# Altium PCB Smart_Podium.PcbDoc (part 3 of 3)
Units mm, origin at the board's own origin, x right, y up, seen from the top; angles counter-clockwise.
Board outline 100 x 100 mm, 4 copper layers (Top Layer, Inner Layer 1 (GND), Inner Layer 2 (GND), Bottom Layer), stack 1.57 mm thick; 107 components, 94 nets, 341 pads, 455 vias.
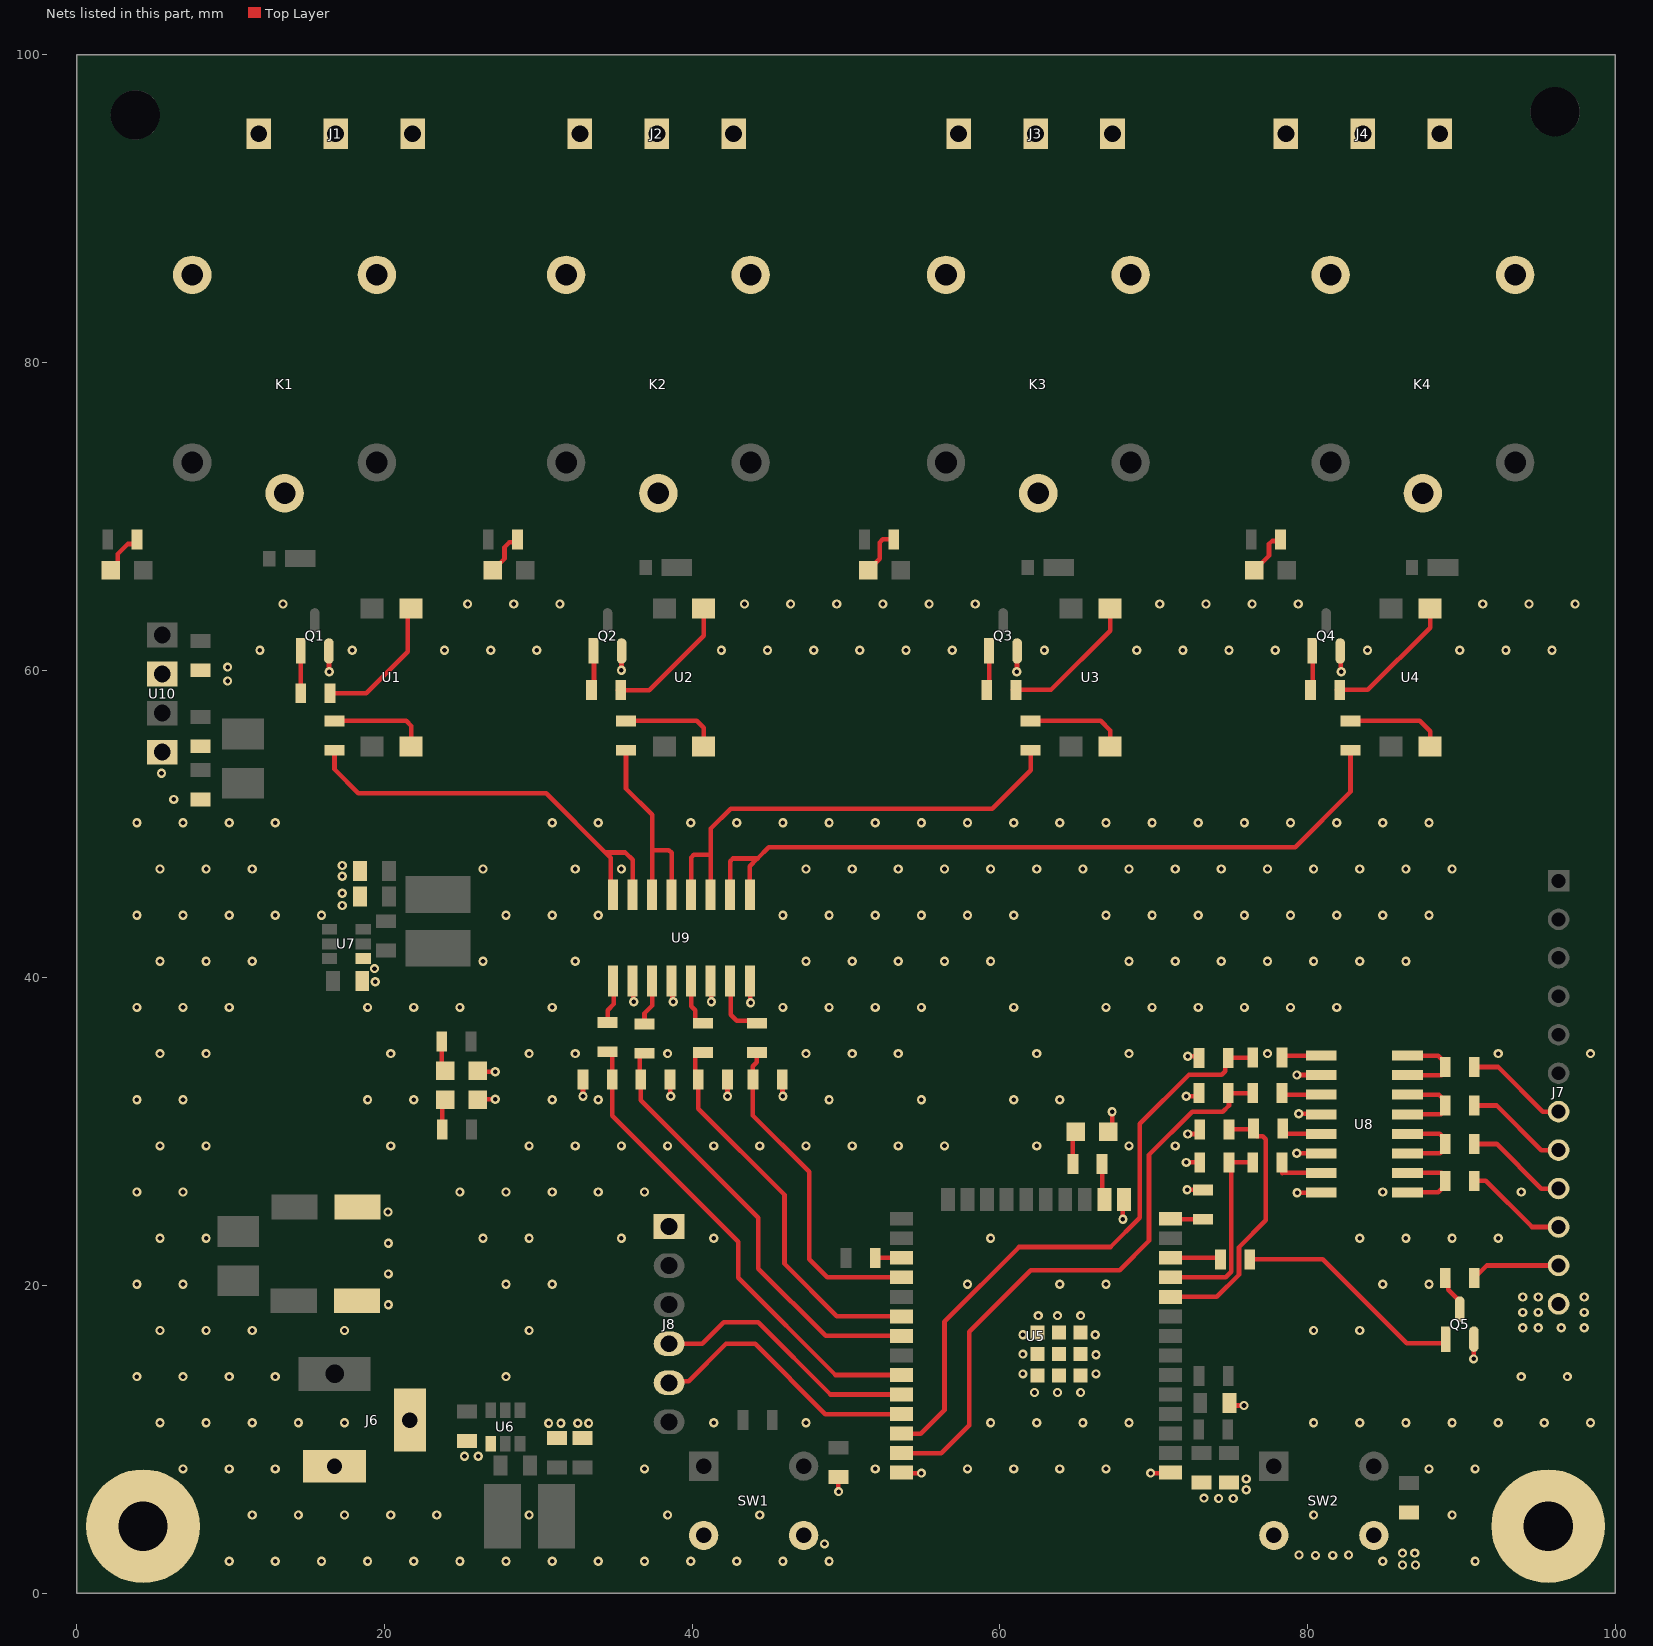
[diagram p4: the nets of this part, all layers, seen from the top]

## Via types
v1: diameter 0.6, hole 0.3, Top Layer to Bottom Layer, tented both sides, 455 vias

## Nets (pads, with @x,y where several pads share a name; then routed paths per layer and width w, separated by ;. In a path a pad name is that pad's centre, name@x,y a point inside that pad or via, vN(x,y) a via of type N, cw(c..) or ccw(c..) an arc to the next point about the centre after c; other vN are vias at no path point) (continued)
GND: C1.1 C2.1 C3.2 C4.1 C5.2 C6.2 C7.1 C8.1 C9.1 C12.1 C13.1 C14.1 C15.1 C16.1 C17.1 D5.1 D6.1 D11.1 J6.2 J6.3 J7.12 J8.1 MH1.1 MH2.1 Q5.2 R12.2 R30.2 R31.2 R32.2 R33.2 R34.2 R35.2 R36.2 R37.2 SW1.3 SW1.4 SW2.3 SW2.4 U5.1 U5.15 U5.38 U5.39_1 U5.39_2 U5.39_3 U5.39_4 U5.39_5 U5.39_6 U5.39_7 U5.39_8 U5.39_9 U6.4 U7.4 U8.10 U8.12 U8.14 U8.16 U9.10 U9.12 U9.14 U9.16 U10.1 | length 31.8
  Top Layer w0.3: D6.1@26.05,32.075 26.075,32.1 v1(27.2,32.1) ; D5.1@26.05,33.95 26.1,33.9 v1(27.2,33.9) ; v1(32.9,32.3) R34.2@32.9,33.4 ; U9.10@36.125,39.8 36.163,39.762 36.163,38.487 v1(36.2,38.45) ; R35.2@38.55,33.4 38.575,33.375 38.575,32.325 v1(38.6,32.3) ; U9.12@38.665,39.8 38.72,39.745 38.72,38.505 v1(38.775,38.45) ; U9.14@41.205,39.8 41.227,39.777 41.227,38.472 v1(41.25,38.45) ; v1(42.3,32.3) R36.2@42.3,33.4 ; U9.16@43.745,39.8 43.772,39.772 43.772,38.403 v1(43.8,38.375) ; R37.2@45.85,33.4 45.875,33.375 45.875,32.325 v1(45.9,32.3) ; C7.1@49.5,7.55 49.5,6.618 v1(49.518,6.6) ; U5.38@53.6,7.83 53.63,7.8 v1(54.9,7.8) ; D11.1@67.05,30 67.3,30.25 v1(67.3,31.3) ; v1(68,24.3) 68,25.525 U5.15@68.065,25.59 ; v1(69.8,7.8) 71.07,7.8 U5.1@71.1,7.83 ; v1(72.113,27.999) 72.999,27.999 R33.2@73,28 ; v1(72.113,32.299) 72.75,32.299 72.95,32.499 R31.2@72.95,32.5 ; v1(72.175,26.225) 72.187,26.213 73.187,26.213 R12.2@73.2,26.2 ; v1(72.213,29.849) 72.8,29.849 73,30.049 R32.2@73,30.15 ; v1(72.213,34.899) 72.851,34.899 R30.2@72.95,34.8 ; C1.1@74.925,12.2 v1(75.875,12.2) ; v1(79.305,28.595) 80.895,28.595 U8.14@80.9,28.59 ; v1(79.315,33.685) 80.885,33.685 U8.10@80.9,33.67 ; v1(79.325,26.025) 80.875,26.025 U8.16@80.9,26.05 ; v1(79.435,31.165) 80.865,31.165 U8.12@80.9,31.13 ; v1(90.8,15.225) 90.807,15.232 90.807,16.503 Q5.2@90.815,16.511
  other v1: 86.175,1.825 87.025,1.825 9.9,2.075 12.9,2.075 15.9,2.075 18.9,2.075 21.9,2.075 24.9,2.075 27.9,2.075 30.9,2.075 33.9,2.075 36.9,2.075 39.9,2.075 42.9,2.075 45.9,2.075 48.9,2.075 84.9,2.075 90.9,2.075 80.525,2.45 81.65,2.45 79.45,2.475 82.675,2.475 86.175,2.6 86.975,2.6 48.6,3.2 11.4,5.075 14.4,5.075 17.4,5.075 20.4,5.075 23.4,5.075 29.4,5.075 38.4,5.075 44.4,5.075 80.4,5.075 89.4,5.075 74.225,6.15 75.175,6.15 73.275,6.175 76.025,6.725 76.025,7.425 6.9,8.075 9.9,8.075 12.9,8.075 36.9,8.075 51.9,8.075 57.9,8.075 60.9,8.075 63.9,8.075 66.9,8.075 87.9,8.075 90.9,8.075 25.2,8.9 26.1,8.9 30.665,11.046 31.465,11.046 32.565,11.046 33.265,11.046 5.4,11.075 8.4,11.075 11.4,11.075 14.4,11.075 17.4,11.075 41.4,11.075 47.4,11.075 59.4,11.075 62.4,11.075 65.4,11.075 68.4,11.075 80.4,11.075 83.4,11.075 86.4,11.075 89.4,11.075 92.4,11.075 95.4,11.075 98.4,11.075 62.253,13.04 63.753,13.04 65.253,13.04 3.9,14.075 6.9,14.075 9.9,14.075 12.9,14.075 27.9,14.075 93.9,14.075 96.9,14.075 61.5,14.25 66.25,14.25 66.25,15.5 61.503,15.54 61.503,16.79 66.2,16.8 5.4,17.075 8.4,17.075 11.4,17.075 17.4,17.075 29.4,17.075 80.4,17.075 83.4,17.075 94,17.25 95,17.25 96.5,17.25 98,17.25 62.503,18.04 63.753,18.04 65.253,18.04 94,18.25 95,18.25 98,18.25 20.25,18.75 94,19.25 95,19.25 98,19.25 3.9,20.075 6.9,20.075 27.9,20.075 30.9,20.075 57.9,20.075 63.9,20.075 66.9,20.075 84.9,20.075 87.9,20.075 20.25,20.75 20.25,22.75 5.4,23.075 8.4,23.075 26.4,23.075 29.4,23.075 35.4,23.075 41.4,23.075 59.4,23.075 83.4,23.075 86.4,23.075 89.4,23.075 92.4,23.075 20.225,24.775 3.9,26.075 6.9,26.075 24.9,26.075 27.9,26.075 30.9,26.075 33.9,26.075 36.9,26.075 84.9,26.075 93.9,26.075 5.4,29.075 8.4,29.075 20.4,29.075 29.4,29.075 32.4,29.075 35.4,29.075 38.4,29.075 41.4,29.075 44.4,29.075 47.4,29.075 50.4,29.075 53.4,29.075 56.4,29.075 62.4,29.075 68.4,29.075 71.4,29.075 3.9,32.075 6.9,32.075 18.9,32.075 21.9,32.075 30.9,32.075 33.9,32.075 48.9,32.075 54.9,32.075 60.9,32.075 63.9,32.075 5.4,35.075 8.4,35.075 20.4,35.075 29.4,35.075 32.4,35.075 38.4,35.075 47.4,35.075 50.4,35.075 53.4,35.075 62.4,35.075 68.4,35.075 77.4,35.075 92.4,35.075 98.4,35.075 3.9,38.075 6.9,38.075 9.9,38.075 18.9,38.075 21.9,38.075 24.9,38.075 30.9,38.075 45.9,38.075 48.9,38.075 51.9,38.075 54.9,38.075 60.9,38.075 66.9,38.075 69.9,38.075 72.9,38.075 75.9,38.075 78.9,38.075 81.9,38.075 19.4,39.75 19.35,40.6 5.4,41.075 8.4,41.075 11.4,41.075 26.4,41.075 32.4,41.075 47.4,41.075 50.4,41.075 53.4,41.075 56.4,41.075 59.4,41.075 68.4,41.075 71.4,41.075 74.4,41.075 77.4,41.075 80.4,41.075 83.4,41.075 86.4,41.075 3.9,44.075 6.9,44.075 9.9,44.075 12.9,44.075 15.9,44.075 27.9,44.075 30.9,44.075 33.9,44.075 45.9,44.075 48.9,44.075 51.9,44.075 54.9,44.075 57.9,44.075 60.9,44.075 66.9,44.075 69.9,44.075 72.9,44.075 75.9,44.075 78.9,44.075 81.9,44.075 84.9,44.075 87.9,44.075 17.25,44.7 17.25,45.5 17.25,46.6 5.4,47.075 8.4,47.075 11.4,47.075 26.4,47.075 32.4,47.075 35.4,47.075 47.4,47.075 50.4,47.075 53.4,47.075 56.4,47.075 59.4,47.075 62.4,47.075 65.4,47.075 68.4,47.075 71.4,47.075 74.4,47.075 77.4,47.075 80.4,47.075 83.4,47.075 86.4,47.075 89.4,47.075 17.25,47.3 3.9,50.075 6.9,50.075 9.9,50.075 12.9,50.075 30.9,50.075 33.9,50.075 39.9,50.075 42.9,50.075 45.9,50.075 48.9,50.075 51.9,50.075 54.9,50.075 57.9,50.075 60.9,50.075 63.9,50.075 66.9,50.075 69.9,50.075 72.9,50.075 75.9,50.075 78.9,50.075 81.9,50.075 84.9,50.075 87.9,50.075 6.3,51.6 5.5,53.3
GND_Relay: C18.1 Q1.2 Q2.2 Q3.2 Q4.2 U10.3 | length 5.3
  Top Layer w0.3: Q1.2@16.379,61.248 16.39,61.238 16.39,59.91 v1(16.4,59.9) ; v1(35.4,60) 35.407,60.007 35.407,61.241 Q2.2@35.415,61.248 ; v1(61.1,59.9) 61.115,59.915 61.115,61.233 Q3.2@61.13,61.248 ; Q4.2@82.13,61.248 82.165,61.213 82.165,59.935 v1(82.2,59.9)
  other v1: 9.8,59.3 9.8,60.2 11.9,61.3 17.9,61.3 23.9,61.3 26.9,61.3 29.9,61.3 41.9,61.3 44.9,61.3 47.9,61.3 50.9,61.3 53.9,61.3 56.9,61.3 62.9,61.3 68.9,61.3 71.9,61.3 74.9,61.3 77.9,61.3 83.9,61.3 89.9,61.3 92.9,61.3 95.9,61.3 13.4,64.3 25.4,64.3 28.4,64.3 31.4,64.3 43.4,64.3 46.4,64.3 49.4,64.3 52.4,64.3 55.4,64.3 58.4,64.3 70.4,64.3 73.4,64.3 76.4,64.3 79.4,64.3 91.4,64.3 94.4,64.3 97.4,64.3
IO12: R12.1 U5.14 | length 2.1
  Top Layer w0.3: U5.14@71.1,24.34 71.14,24.3 R12.1@73.2,24.3
IO16: R13.1 U5.27 | length 1.7
  Top Layer w0.3: R13.1@51.9,21.8 U5.27@53.6,21.8
IO17: R18.1 R37.1 U5.28 | length 21.6
  Top Layer w0.3: R18.1@44.2,35.15 44.2,34.5 43.95,34.25 R37.1@43.95,33.4 43.95,31.05 47.6,27.4 47.6,21.7 48.77,20.53 U5.28@53.6,20.53
IO18: R19.1 R36.1 U5.30 | length 25.5
  Top Layer w0.3: R19.1@40.7,35.15 40.4,35.15 40.2,34.95 40.2,33.6 R36.1@40.4,33.4 40.4,31.5 46,25.9 46,21.4 49.41,17.99 U5.30@53.6,17.99
IO19: R20.1 R35.1 U5.31 | length 28.5
  Top Layer w0.3: R20.1@36.9,35.1 36.8,35.1 36.6,34.9 36.6,33.45 R35.1@36.65,33.4 36.65,32.05 44.3,24.4 44.3,21.1 48.68,16.72 U5.31@53.6,16.72
IO21: R21.1 R34.1 U5.33 | length 31.5
  Top Layer w0.3: R21.1@34.5,35.2 34.6,35.2 34.8,35 R34.1@34.8,33.4 34.8,31.031 43,22.831 43,20.5 49.32,14.18 U5.33@53.6,14.18
IO22: R17.1 R30.1 U5.36 | length 40.3
  Top Layer w0.3: U5.36@53.6,10.37 54.87,10.37 56.4,11.9 56.4,17.65 61.25,22.5 67.196,22.5 69.1,24.404 69.1,30.5 72.3,33.7 74.424,33.7 74.65,33.926 74.65,34.6 R30.1@74.85,34.8 76.433,34.8 R17.1@76.45,34.817
IO23: R16.1 R31.1 U5.37 | length 39.9
  Top Layer w0.3: U5.37@53.6,9.1 56.2,9.1 58,10.9 58,17 62,21 67.8,21 69.7,22.9 69.7,28.495 72.505,31.3 74.5,31.3 74.9,31.7 74.9,32.45 R31.1@74.85,32.5 76.442,32.5 R16.1@76.45,32.508
IO25: R15.1 R32.1 U5.10 | length 17.5
  Top Layer w0.3: U5.10@71.1,19.26 74.112,19.26 75.55,20.698 75.55,20.905 75.55,22.495 77.3,24.245 77.3,29.5 77.1,29.7 76.7,29.7 76.5,29.9 R15.1@76.5,30.2 76.45,30.15 R32.1@74.9,30.15
IO26: R14.1 R33.1 U5.11 | length 12.8
  Top Layer w0.3: U5.11@71.1,20.53 74.675,20.53 75.05,20.905 75.05,27.85 R33.1@74.9,28 R14.1@76.45,28
IO27: R26.1 U5.12 | length 3.3
  Top Layer w0.3: U5.12@71.1,21.8 74.25,21.8 R26.1@74.35,21.7
IRBaseQ: Q5.1 R26.2 | length 15.2
  Top Layer w0.3: R26.2@76.25,21.7 81,21.7 86.45,16.25 88.822,16.25 88.985,16.413 Q5.1@88.985,16.511
IRLED: J7.11 R27.2 | length 5.8
  Top Layer w0.3: R27.2@90.85,20.5 91.65,21.3 J7.11@96.325,21.3
LBaseQ1: R14.2 U8.15 | length 2.6
  Top Layer w0.3: 78.35,27.3 78.37,27.32 U8.15@80.9,27.32
LBaseQ2: R15.2 U8.13 | length 2.6
  Top Layer w0.3: R15.2@78.35,29.9 78.39,29.86 U8.13@80.9,29.86
LBaseQ3: R16.2 U8.11 | length 2.6
  Top Layer w0.3: R16.2@78.35,32.508 78.458,32.4 U8.11@80.9,32.4
LBaseQ4: R17.2 U8.9 | length 2.6
  Top Layer w0.3: R17.2@78.35,34.817 78.473,34.94 U8.9@80.9,34.94
LEDCollQ1: J7.10 R22.2 | length 6.7
  Top Layer w0.3: R22.2@90.85,26.8 91.6,26.8 94.6,23.8 J7.10@96.325,23.8
LEDCollQ2: J7.9 R23.2 | length 6.7
  Top Layer w0.3: R23.2@90.85,29.2 92.3,29.2 95.2,26.3 J7.9@96.325,26.3
LEDCollQ3: J7.8 R24.2 | length 6.7
  Top Layer w0.3: R24.2@90.85,31.7 92.3,31.7 95.2,28.8 J7.8@96.325,28.8
LEDCollQ4: J7.7 R25.2 | length 6.7
  Top Layer w0.3: R25.2@90.85,34.2 92.4,34.2 95.3,31.3 J7.7@96.325,31.3
NetD5_2: D5.2 R28.1 | length 2
  Top Layer w0.3: R28.1@23.725,35.85 23.725,34.175 D5.2@23.95,33.95
NetD6_2: D6.2 R29.1 | length 2
  Top Layer w0.3: R29.1@23.75,30.15 23.75,31.875 D6.2@23.95,32.075
NetD7_2: D7.2 R38.1 | length 3
  Top Layer w0.3: D7.2@76.55,66.5 77.5,67.45 77.5,68.2 77.7,68.4 78.15,68.4 R38.1@78.25,68.5
NetD8_2: D8.2 R39.1 | length 3.1
  Top Layer w0.3: D8.2@51.45,66.5 52.2,67.25 52.2,68.3 52.4,68.5 R39.1@53.1,68.5
NetD9_2: D9.2 R40.1 | length 2.9
  Top Layer w0.3: D9.2@27.05,66.5 27.8,67.25 27.8,68 28.1,68.3 28.1,68.324 28.474,68.324 R40.1@28.65,68.5
NetD10_2: D10.2 R41.1 | length 2.9
  Top Layer w0.3: D10.2@2.2,66.5 2.65,66.95 2.65,67.55 3.3,68.2 3.7,68.2 3.9,68.4 R41.1@3.9,68.5
NetD11_2: D11.2 R42.1 | length 2.2
  Top Layer w0.3: R42.1@64.75,27.9 64.75,29.8 D11.2@64.95,30
NetQ1_1: Q1.1 R2.2 | length 2.7
  Top Layer w0.3: R2.2@14.55,58.5 Q1.1@14.55,61.248
NetQ2_1: Q2.1 R4.2 | length 2.6
  Top Layer w0.3: Q2.1@33.585,61.248 33.617,61.216 33.617,58.732 R4.2@33.65,58.7
NetQ3_1: Q3.1 R6.2 | length 2.5
  Top Layer w0.3: Q3.1@59.3,61.248 59.325,61.223 59.325,58.75 R6.2@59.35,58.725
NetQ4_1: Q4.1 R8.2 | length 2.6
  Top Layer w0.3: Q4.1@80.3,61.248 80.35,61.198 80.35,58.775 R8.2@80.4,58.725
NetQ5_3: Q5.3 R27.1 | length 2.4
  Top Layer w0.3: R27.1@88.95,20.5 89.15,20.3 89.15,19.73 89.9,18.98 Q5.3@89.9,18.464
NetR1_2: R1.2 U1.2 | length 6.5
  Top Layer w0.3: R1.2@16.75,56.7 21.4,56.7 21.726,56.374 U1.2@21.726,55.025
NetR2_1: R2.1 U1.3 | length 9.1
  Top Layer w0.3: R2.1@16.45,58.5 18.8,58.5 21.5,61.2 21.5,63.799 U1.3@21.726,64.025
NetR3_2: R3.2 U2.2 | length 6.5
  Top Layer w0.3: R3.2@35.7,56.7 40.3,56.7 40.75,56.25 U2.2@40.75,55.026
NetR4_1: R4.1 U2.3 | length 8.8
  Top Layer w0.3: R4.1@35.15,58.7 37.2,58.7 40.749,62.249 U2.3@40.749,64.025
NetR5_2: R5.2 U3.2 | length 6.5
  Top Layer w0.3: R5.2@62,56.7 66.55,56.7 67.17,56.08 U3.2@67.17,55.025
NetR6_1: R6.1 U3.3 | length 9.4
  Top Layer w0.3: R6.1@60.85,58.725 63.325,58.725 67.17,62.57 U3.3@67.17,64.025
NetR7_2: R7.2 U4.2 | length 6.5
  Top Layer w0.3: R7.2@82.8,56.7 87.3,56.7 87.97,56.03 U4.2@87.97,55.025
NetR8_1: R8.1 U4.3 | length 9
  Top Layer w0.3: R8.1@81.9,58.725 83.925,58.725 87.97,62.77 U4.3@87.97,64.025
NetR22_1: R22.1 U8.1 U8.2 | length 5.8
  Top Layer w0.3: U8.1@86.5,26.05 88.5,26.05 88.95,26.5 R22.1@88.95,26.8 88.95,27.1 88.73,27.32 U8.2@86.5,27.32
NetR23_1: R23.1 U8.3 U8.4 | length 5.8
  Top Layer w0.3: U8.3@86.5,28.59 88.64,28.59 88.95,28.9 R23.1@88.95,29.2 88.95,29.5 88.59,29.86 U8.4@86.5,29.86
NetR24_1: R24.1 U8.5 U8.6 | length 5.8
  Top Layer w0.3: U8.5@86.5,31.13 88.68,31.13 88.95,31.4 R24.1@88.95,31.7 88.95,32 88.55,32.4 U8.6@86.5,32.4
NetR25_1: R25.1 U8.7 U8.8 | length 5.8
  Top Layer w0.3: U8.7@86.5,33.67 88.72,33.67 88.95,33.9 R25.1@88.95,34.2 88.95,34.5 88.51,34.94 U8.8@86.5,34.94
RBaseQ1: R21.2 U9.9 | length 2.9
  Top Layer w0.3: R21.2@34.5,37.1 34.5,37.9 34.9,38.3 34.9,39.755 U9.9@34.855,39.8
RBaseQ2: R20.2 U9.11 | length 3
  Top Layer w0.3: R20.2@36.9,37 36.9,37.7 37.4,38.2 37.4,39.795 U9.11@37.395,39.8
RBaseQ3: R19.2 U9.13 | length 3.2
  Top Layer w0.3: U9.13@39.935,39.8 39.935,38.165 40.2,37.9 40.2,37.25 40.4,37.05 R19.2@40.7,37.05
RBaseQ4: R18.2 U9.15 | length 4.1
  Top Layer w0.3: U9.15@42.475,39.8 42.5,39.775 42.5,37.6 42.9,37.2 44.05,37.2 R18.2@44.2,37.05
Relay1_Out1: J1.2 K1.2
Relay1_Out2: J1.1 K1.3
Relay1_Out3: J1.3 K1.5
Relay2_Out1: J2.2 K2.2
Relay2_Out2: J2.1 K2.3
Relay2_Out3: J2.3 K2.5
Relay3_Out1: J3.2 K3.2
Relay3_Out2: J3.1 K3.3
Relay3_Out3: J3.3 K3.5
Relay4_Out1: J4.2 K4.2
Relay4_Out2: J4.1 K4.3
Relay4_Out3: J4.3 K4.5
RelayInp1: R1.1 U9.7 U9.8 | length 28.3
  Top Layer w0.3: R1.1@16.75,54.8 16.75,53.55 18.3,52 30.5,52 34.35,48.15 ; U9.8@34.855,45.4 34.7,45.555 34.7,47.8 34.35,48.15 ; U9.7@36.125,45.4 36.125,47.675 35.65,48.15 34.35,48.15
RelayInp2: R3.1 U9.5 U9.6 | length 14
  Top Layer w0.3: R3.1@35.7,54.675 35.7,52.3 37.395,50.605 37.395,48.3 ; U9.6@37.395,45.4 37.395,48.3 ; U9.5@38.665,45.4 38.665,48.124 38.489,48.3 37.395,48.3
RelayInp3: R5.1 U9.3 U9.4 | length 31.6
  Top Layer w0.3: U9.4@39.935,45.4 39.935,47.819 40.111,47.995 41.205,47.995 ; U9.3@41.205,45.4 41.205,47.995 ; R5.1@62,54.675 62,53.5 59.5,51 42.5,51 41.205,49.705 41.205,47.995
RelayInp4: R7.1 U9.1 U9.2 | length 49.5
  Top Layer w0.3: U9.2@42.475,45.4 42.475,47.575 42.655,47.755 44.245,47.755 ; U9.1@43.745,45.4 43.745,47.255 44.245,47.755 ; R7.1@82.8,54.675 82.8,52.1 79.2,48.5 44.99,48.5 44.245,47.755
RX: J8.5 U5.35 | length 18.2
  Top Layer w0.3: J8.5@38.5,13.67 38.67,13.5 38.939,13.769 39.769,13.769 42.2,16.2 44.1,16.2 48.66,11.64 U5.35@53.6,11.64
TX: J8.4 U5.34 | length 17.6
  Top Layer w0.3: J8.4@38.5,16.21 40.66,16.21 42.05,17.6 44.3,17.6 48.99,12.91 U5.34@53.6,12.91
USER_LED: R42.2 U5.16 | length 2.4
  Top Layer w0.3: R42.2@66.65,27.9 66.65,25.735 U5.16@66.795,25.59
pads on no net: MH3.1 MH4.1 U5.4 U5.5 U5.7 U5.8 U5.9 U5.13 U5.17 U5.18 U5.19 U5.20 U5.21 U5.22 U5.23 U5.32

## Polygon pours and split planes (outlines as drawn)
+12V on Top Layer "+12v" (solid, pour order 64): 9,24.75 9,34.275 13.725,39 16.5,39 17.1,38.4 17.1,28.35 15.75,27 15.75,24.75
+5V on Top Layer "+5V_L01_P113" (solid, pour order 113): 15.7,51.4 17.5,49.6 25.2,49.6 25.2,50.3 25,50.5 18.7,50.5 16.8,52.4 12.9,52.4 12.9,51.4
Coll_Q1 on Top Layer "COLL_Q1_L01_P112" (solid, pour order 112): 4.6,66.9 7.4,66.9 8.1,67.6 8.5,67.6 8.8,67.3 8.7,67.2 8.4,67.2 7.7,66.5 4.6,66.5
Coll_Q2 on Top Layer "COLL_Q2_L01_P111" (solid, pour order 111): 29,66.7 33.3,66.7 33.4,66.6 33.4,66.2 29,66.2
Coll_Q3 on Top Layer "COLL_Q3_L01_P110" (solid, pour order 110): 53,66.8 57.7,66.8 57.7,66.3 53,66.3
Coll_Q4 on Top Layer "COLL_Q4_L01_P109" (solid, pour order 109): 78.1,67.1 78.1,65.9 80.6,65.9 80.6,67.1
+12V on Top Layer "+12V" (solid, pour order 28): 13.6,38 17.1,38 17.1,42.3 16.8,42.6 13.6,42.6
GND on Top Layer "GND" (solid, pour order 40): 49.2,4.9 46.2,4.9 44.8,3.5 38.6,3.5 38.6,1.1 38.7,1 38.8,1.1 46.9,1.1 47.7,1.9 47.7,2.7 48.9,2.7 49.2,3
GND on Top Layer "GND" (solid, pour order 21): 76.65,1.075 87.8,1.075 87.825,1.05 87.825,5.6 77.975,5.6 76.625,4.25 76.65,4.225 76.65,4.075
5V_in on Top Layer "5V_IN_L01_P108" (solid, pour order 108): 4.5,58 4.5,56.4 8.8,56.4 8.8,57.5 7.2,57.5 6.7,58
GND_Relay on Top Layer "GND_RELAY_L01_P105" (solid, pour order 105): 10.7,60.6 10.8,60.5 10.8,58.8 3.5,58.8 3.1,59.2 3.1,60.4 3.3,60.6 4.6,60.6
+5V_Relay on Top Layer "+5V_RELAY_L01_P102" (solid, pour order 102): 18.2,74.8 18.2,68.7 17.4,67.9 13.7,67.9 13.5,67.7 13.5,67.1 14.1,66.5 16.8,66.5 18.4,64.9 18.4,63.4 19.9,63.4 19.9,64.7 20.8,65.6 20.8,74.8
Coll_Q1 on Top Layer "COLL_Q1_L01_P101" (solid, pour order 101): 8.6,69.1 10,67.7 13,67.7 13,66.8 12.9,66.7 8.8,66.7 6.2,69.3 6.2,74.9 8.6,74.9 8.6,73.9
Coll_Q1 on Top Layer "COLL_Q1_L01_P099" (solid, pour order 99): 12.1,66.6 15,63.7 15,62.9 16,62.9 16,64.3 15.5,64.8 15,64.8 13,66.8 13,67.7 12.1,67.7 12.1,67.4
+5V_Relay on Top Layer "+5V_RELAY_L01_P096" (solid, pour order 96): 4.5,63.1 4.5,61.4 4.6,61.3 10.9,61.3 10.9,63 10.8,63.1 10.6,63.1
+5V on Top Layer "+5V_L01_P094" (solid, pour order 94): 14.8,53.7 14.7,53.6 14.7,51.4 9.6,51.4 9.3,51.7 9.3,53.5 9.5,53.7
GND on Top Layer "GND_L01_P093" (solid, pour order 93): 8.4,55.5 4.2,55.5 4.2,53.7 5.6,52.3 5.6,50.8 8.4,50.8 8.5,50.9 8.5,52.3 6.7,52.3 6.3,52.7 6.3,54.4 8.4,54.4
+5V on Top Layer "+5V_L01_P092" (solid, pour order 92): 8.5,53 9.1,52.4 9.1,51.6 11.9,51.6 11.9,53.7 9.2,53.7 8.9,54 7,54 7,53 7.2,53
5V_in on Top Layer "5V_IN_L01_P091" (solid, pour order 91): 7.1,56.5 8.4,56.5 9.1,55.8 9.1,54.9 9.2,54.8 11.9,54.8 11.9,56.9 11.8,57 8.7,57 8.4,57.3 8.4,57.4 7.1,57.4
GND on Top Layer "GND" (solid, pour order 20): 72.125,8.325 72.625,7.825 76.35,7.825 76.35,5.85 73.15,5.85 71.725,7.275 70.35,7.275 70.35,8.3 70.325,8.325
+5V on Top Layer "+5V" (solid, pour order 26): 19.85,47.6 19.85,44.6 21.05,44.6 21.25,44.4 21.25,44.2 25.55,44.2 25.55,46.6 21.55,46.6 21.35,46.8 21.35,47.6
+5V on Top Layer "+5V" (solid, pour order 44): 21.45,50.5 21.25,50.3 21.25,46.6 25.55,46.6 25.35,46.8 25.35,50.5 21.35,50.5
Relay1_Out2 on Top Layer "Relay1_Out2" (solid, pour order 85): 10.2,92.4 8.8,91 6.5,91 5.5,90 5.5,83.8 9.4,83.8 10.1,84.5 10.1,89 11.7,89 13.6,90.9 13.6,96.8 10.2,96.8
Relay1_Out1 on Top Layer "Relay1_Out1" (solid, pour order 84): 15.1,96.8 15.1,90.3 11.7,86.9 11.7,70.2 15.2,70.2 15.3,70.1 15.3,86.7 18.2,89.6 18.2,96.8
Relay1_Out3 on Top Layer "Relay1_Out3" (solid, pour order 83): 20.299,96.802 20.299,89.602 17.599,86.902 17.599,83.702 21.699,83.702 21.599,83.802 21.599,86.602 23.299,88.302 23.299,96.802
Relay4_Out3 on Top Layer "Relay4_Out3" (solid, pour order 82): 87.8,96.299 91.1,96.299 92,95.399 92,89.999 93.8,89.999 95.4,88.399 95.4,83.399 92,83.399 91.7,83.699 91.7,87.799 90.8,88.699 90.8,92.899 87.9,92.899 87.8,92.999 87.8,96.399
Relay4_Out1 on Top Layer "Relay4_Out1" (solid, pour order 81): 82.005,96.756 82.005,92.856 85.205,89.656 85.205,70.056 89.505,70.056 89.505,88.656 85.205,92.956 85.205,96.756
Relay4_Out2 on Top Layer "Relay4_Out2" (solid, pour order 80): 80.18,91.363 80.555,90.988 83.355,88.888 83.355,83.788 80.055,83.788 78.955,84.888 78.955,88.188 76.78,89.988 76.78,96.788 80.18,96.788
Relay3_Out3 on Top Layer "Relay3_Out3" (solid, pour order 79): 66.1,96.795 66.1,89.795 66.7,89.195 66.7,83.995 70.1,83.995 70.1,89.595 68.7,90.995 68.7,96.795
Relay3_Out1 on Top Layer "Relay3_Out1" (solid, pour order 78): 60.428,96.779 60.428,69.879 64.628,69.879 64.628,96.779
Relay2_Out1 on Top Layer "Relay2_Out1" (solid, pour order 75): 35.794,96.822 35.794,69.922 39.994,69.922 39.994,96.822
Relay2_Out2 on Top Layer "Relay2_Out2" (solid, pour order 74): 29.6,96.8 29.6,83.7 29.7,83.6 33.9,83.6 33.9,96.8
+5V on Top Layer "+5v" (solid, pour order 73): 18.4,55.7 18.4,53.2 20,53.2 20,55.7
+5V on Top Layer "+5v" (solid, pour order 72): 37.4,55.7 37.4,53.4 39,53.4 39,55.7
+5V on Top Layer "+5v" (solid, pour order 71): 63.8,55.7 63.8,53.4 65.5,53.4 65.5,55.7
+5V on Top Layer "+5v" (solid, pour order 70): 84.6,55.7 84.6,53.4 86.3,53.4 86.3,55.7
GND on Top Layer "gnd" (solid, pour order 69): 21.2,12.8 21.2,8.9 21,8.7 15.2,8.7 15.2,7.775 26.8,7.775 26.8,10.4 23.6,10.4 23.6,12.8
+5V_Relay on Top Layer "+5V_Relay" (solid, pour order 61): 92,74.75 92,68.75 88.5,68.75 87.75,68 87.75,65.75 84.5,65.75 84.5,63.25 86.25,63.25 86.25,63.875 87.15,65 91.2,65 94.75,68.55 94.75,74.75
Coll_Q4 on Top Layer "COLL_Q4_L01_P060" (solid, pour order 60): 80.25,74.75 80.25,62.5 82.25,62.5 82.5,62.75 82.5,65 83.5,66 87.25,66 87.25,67.5 83.75,67.5 83,68.25 83,74.75
+5V_Relay on Top Layer "+5V_Relay" (solid, pour order 59): 67,74.75 67,68.75 63.25,68.75 62.75,68.25 62.75,64 63.5,63.25 65.5,63.25 65.5,65.25 66.75,66.5 70.25,66.5 70.25,74.5 70,74.75
Coll_Q3 on Top Layer "COLL_Q3_L01_P058" (solid, pour order 58): 55.25,74.75 55.25,70.75 57.25,68.75 57.25,65.5 58.5,65.5 59.75,64.25 59.75,62.75 60,62.5 60.75,62.5 62.25,62.5 62.25,67.75 61.1,68.9 58.6,68.9 58.6,74.65 58.5,74.75
+5V_Relay on Top Layer "+5V_Relay" (solid, pour order 57): 42.25,74.75 42.25,68.5 38.5,68.5 38,68 38,65.75 37.5,65.25 37.5,63.25 39,63.25 39,65 40.25,66.25 40.25,67.25 44.75,67.25 45.25,67.75 45.25,74.75
Coll_Q2 on Top Layer "COLL_Q2_L01_P055" (solid, pour order 55): 30.25,75 30.25,69.05 34,65.3 34,62.75 35.25,62.75 35.5,63 35.5,65 36.5,66 37.5,66 37.5,67.5 35,67.5 33.25,69.25 33.25,75
GND on Top Layer "GND" (solid, pour order 52): 66,18.5 66.75,17.75 66.75,13.5 65.75,12.5 62,12.5 61,13.5 61,17.75 61.75,18.5
+12V on Top Layer "+12V" (solid, pour order 50): 24.4,13.6 24.4,11 26.4,11 26.4,13.6
+3V3 on Top Layer "+3V3" (solid, pour order 47): 74.3,11.275 74.3,9.8 74.1,9.6 69.4,9.6 69.4,8.6 76.75,8.6 76.75,11.275
+3V3 on Top Layer "+3V3" (solid, pour order 46): 48.3,21.6 48.4,21.5 49.6,21.5 49.6,21.2 49.7,21.1 50.4,21.1 50.4,23.5 50.3,23.6 48.3,23.6 48.3,22.8
+3V3 on Top Layer "+3V3" (solid, pour order 45): 32,7.943 32,5.7 35.2,5.7 35.2,7.943
+3V3 on Top Layer "+3v3" (solid, pour order 34): 30.5,7.5 30.2,7.2 30,7.2 29.9,7.1 29.9,2.9 30,2.8 32.4,2.8 32.5,2.9 32.5,7 33.2,7.7 33.5,7.7 33.5,8.6 30.5,8.6
GND on Top Layer "GND" (solid, pour order 36): 19.35,41.6 19.35,41 19.85,41 19.95,40.9 19.95,39.1 18.05,39.1 18.05,41.6
GND on Top Layer "GND" (solid, pour order 39): 27.2,9.2 26.6,9.2 26.6,8.6 26.5,8.5 24.7,8.5 24.7,10.4 27.2,10.4
GND on Top Layer "GND" (solid, pour order 38): 33.665,9.246 30.165,9.246 30.165,11.446 33.665,11.446
+12V on Top Layer "+12" (solid, pour order 37): 28.2,12.4 24.6,12.4 24.6,11.1 24.7,11 28.2,11
BUCK3V3_BST on Top Layer "BUCK3V3_BST" (solid, pour order 32): 28.5,10.2 28.5,9.3 29.1,8.7 29.1,7.7 30,7.7 30,9 29.7,9.3 29.2,9.3 29.2,10.2
BUCK3V3_SW on Top Layer "BUCK3V3_SW" (solid, pour order 31): 27.5,10.2 27.5,9.2 27.3,9 27.2,9 27.2,7.5 27,7.3 26.4,7.3 26.4,2.9 28.9,2.9 28.9,7.1 28.5,7.5 28.2,7.5 28.2,10.2
GND on Top Layer "GND" (solid, pour order 30): 19.05,47.7 19.05,44.2 16.85,44.2 16.85,47.7
BUCK5V_SW on Top Layer "BUCK5V_SW" (solid, pour order 29): 20.25,42.2 20.25,41.4 24.95,41.4 24.95,42.4 21.85,42.4 21.65,42.2
BUCK5V_BST on Top Layer "BUCK5V_BST" (solid, pour order 27): 18.15,43.5 19.35,43.5 19.45,43.6 19.45,44.2 20.85,44.2 20.85,43.2 19.45,43.2 19.45,42.8 18.15,42.8
+12V on Top Layer "+12v" (solid, pour order 25): 9,26 9,22.5 15.5,22.5 15.75,22.75 15.75,26
GND on Top Layer "GND" (solid, pour order 24): 16.75,26.25 16.75,18 21.25,18 21.25,26.25
+12V_JACK on Top Layer "+12V_JACK" (solid, pour order 23): 15.75,22 16,21.75 16,16.25 16.5,15.75 19.5,15.75 19.75,15.5 19.75,12.75 19.5,12.5 14,12.5 13.5,13 13.5,17.25 12.75,18 9,18 9,22
GND on Top Layer "GND" (solid, pour order 22): 98.75,19.813 93.5,19.813 93.5,16.538 98.75,16.538
Relay2_Out3 on Top Layer "Relay2_Out3" (solid, pour order 18): 41.375,96.7 41.375,89.7 41.975,89.1 41.975,83.9 45.375,83.9 45.375,89.5 43.975,90.9 43.975,96.7
Relay3_Out2 on Top Layer "Relay3_Out2" (solid, pour order 6): 54.098,96.927 54.098,83.827 54.198,83.727 59,83.727 59,96.927
+12V on Bottom Layer "+12v" (solid, pour order 65): 13.75,42.75 13.75,39.75 9,35 9,22.5 13.75,22.5 24.5,11.75 27,11.75 27,21 18,30 18,40.5 15.75,42.75
+5V on Bottom Layer "+5v" (solid, pour order 67): 8.65,53.85 8.65,50.75 14.5,50.75 17,48.25 26,48.25 30.5,52.75 89.25,52.75 91.75,45 99.25,45 99.25,53.5 94.25,58.5 13.3,58.5
+3V3 on Bottom Layer "+3v3" (solid, pour order 89): 99,44.7 99.2,44.5 99.2,42.4 99,42.2 93.8,42.2 93.3,41.7 93.3,40.7 87.5,34.9 87.5,30.75 79,22.25 79,10 77.3,8.3 69.05,8.3 69,8.3 69,11.3 68.5,11.8 36.6,11.8 36,11.2 36,3.7 35.3,3 32.8,3 32.2,3.6 32.2,19.1 32.7,19.6 41.3,19.6 43.5,21.8 43.5,25.25 46.05,27.8 55.4,27.8 56.1,27.1 56.1,18.7 56.5,18.3 73.9,18.3 74.4,18.8 74.4,24.5 80.8,30.9 80.8,34.6 81,34.6 91.1,44.7
+5V_Relay on Bottom Layer "+5V_Relay" (solid, pour order 42): 10.9,61.2 10.9,64.9 99.5,64.9 99.5,75.6 91.65,75.6 91.65,68.9 77.9,68.9 75.9,70.9 75.9,75.6 66.9,75.6 66.7,75.4 66.8,75.3 66.8,69 52,69 50.5,70.5 50.5,75.5 42,75.5 42.1,75.4 42.1,68.8 27.3,68.8 25.7,70.4 25.7,75.3 17.6,75.3 17.6,69 17.3,68.7 0.6,68.7 0.6,61.2
+3V3 on Bottom Layer "+3v3" (solid, pour order 87): 26.25,30.4 26.25,28.65 34.8,20.1 34.8,18.9 35.5,18.9 35.5,20.5 26.975,29.025 26.975,30.4
+5V on Bottom Layer "+5v" (solid, pour order 86): 26.275,35.4 26.275,37.075 28.5,39.3 28.5,50.25 28.125,50.625 28.6,51.1 29.2,50.5 29.2,39 26.975,36.775 26.975,35.4
Relay2_Out3 on Bottom Layer "Relay2_Out3" (solid, pour order 76): 41.471,96.727 41.471,89.727 42.071,89.127 42.071,83.927 45.471,83.927 45.471,89.527 44.071,90.927 44.071,96.727
Relay1_Out2 on Bottom Layer "Relay1_Out2" (solid, pour order 3): 10.2,92.4 8.8,91 6.5,91 5.5,90 5.5,83.8 9.4,83.8 10.1,84.5 10.1,89 11.7,89 13.6,90.9 13.6,96.8 10.2,96.8
Relay1_Out1 on Bottom Layer "Relay1_Out1" (solid, pour order 7): 15.1,96.8 15.1,90.3 11.7,86.9 11.7,70.2 15.2,70.2 15.3,70.1 15.3,86.7 18.2,89.6 18.2,96.8
Relay1_Out3 on Bottom Layer "Relay1_Out3" (solid, pour order 9): 20.3,96.8 20.3,89.6 17.6,86.9 17.6,83.7 21.7,83.7 21.6,83.8 21.6,86.6 23.3,88.3 23.3,96.8
Relay4_Out3 on Bottom Layer "Relay4_Out3" (solid, pour order 17): 87.8,96.4 91.1,96.4 92,95.5 92,90.1 93.8,90.1 95.4,88.5 95.4,83.5 92,83.5 91.7,83.8 91.7,87.9 90.8,88.8 90.8,93 87.9,93 87.8,93.1 87.8,96.5
Relay4_Out1 on Bottom Layer "Relay4_Out1" (solid, pour order 16): 82,96.8 82,92.9 85.2,89.7 85.2,70.1 89.5,70.1 89.5,88.7 85.2,93 85.2,96.8
Relay4_Out2 on Bottom Layer "Relay4_Out2" (solid, pour order 4): 80.225,91.375 80.6,91 83.4,88.9 83.4,83.8 80.1,83.8 79,84.9 79,88.2 76.825,90 76.825,96.8 80.225,96.8
Relay3_Out3 on Bottom Layer "Relay3_Out3" (solid, pour order 19): 66.1,96.8 66.1,89.8 66.7,89.2 66.7,84 70.1,84 70.1,89.6 68.7,91 68.7,96.8
Relay3_Out1 on Bottom Layer "Relay3_Out1" (solid, pour order 12): 60.425,96.8 60.425,69.9 64.625,69.9 64.625,96.8
Relay3_Out2 on Bottom Layer "Relay3_Out2" (solid, pour order 77): 54.093,96.935 54.093,83.835 54.193,83.735 58.995,83.735 58.995,96.935
Relay2_Out1 on Bottom Layer "Relay2_Out1" (solid, pour order 11): 35.8,96.8 35.8,69.9 40,69.9 40,96.8
Relay2_Out2 on Bottom Layer "Relay2_Out2" (solid, pour order 5): 29.6,96.8 29.6,83.7 29.7,83.6 33.9,83.6 33.9,96.8
GND on Inner Layer 1 (GND) "GND_L02_P001" (solid, pour order 1): 0.6,57.2 99.225,57.2 99.225,1.025 75.5,1.025 75.5,6 72.675,6 71.675,7 50.1,7 49.9,6.8 49.9,1.025 0.6,1.025
GND_Relay on Inner Layer 1 (GND) "GND_RELAY_L02_P106" (solid, pour order 106): 2.45,67.71 2.45,58.61 98.9,58.61 98.9,59.96 98.9,67.71 2.25,67.71
GND on Inner Layer 2 (GND) "GND_L03_P002" (solid, pour order 2): 0.675,57.2 99.45,57.2 99.45,1.075 75.5,1.075 75.5,6 72.7,6 71.7,7 49.7,7 49.7,1.075 0.675,1.075
GND_Relay on Inner Layer 2 (GND) "GND_RELAY_L03_P107" (solid, pour order 107): 2.219,67.729 2.219,58.629 99.2,58.629 99.2,59.648 99.2,67.729

## Other copper
Bottom Layer:
  pour cut-out: 18.5,75.5 17.5,74.5 17.4,74.5 17.4,75.3 17.1,75.6 17.9,76.4 18,76.4 18,75.9 18.5,75.4
  pour cut-out: 25.9,74.7 24.9,75.7 24.9,75.8 25.6,75.8 26.3,76.5 26.8,76 26.8,75.6
  pour cut-out: 42.3,74.5 41.3,74.5 41.3,75.4 42.1,76.2 43.6,76.2 43.6,75.8 43.4,75.6
  pour cut-out: 50.6,74.7 50.6,74.9 49.4,76.1 50.5,77.2 50.9,77.2 51.5,76.6 50.7,75.8 50.7,74.8 50.6,74.8 50.5,74.7
  pour cut-out: 66.7,74.9 66.7,74.7 66.3,74.7 65.9,75.1 66.1,75.3 66.1,76.3 66.7,76.9 67.4,76.2 67.7,76.2 67.7,76 67.5,75.8 67.5,75.7
  pour cut-out: 76,75 75.2,75.8 76.1,76.7 76.8,76.7 77.1,76.4 76.8,76.1 76.8,75.3 76.3,75.3
  pour cut-out: 99.5,75.1 98.9,75.7 98.9,75.9 99.5,75.9 99.6,75.8 99.8,75.8 99.8,75.3 99.9,75.2 99.8,75.1
  pour cut-out: 92.4,75.6 91.8,75 91.5,75.3 91.5,75.6 91.3,75.8 91.4,75.9 92.2,75.9 92.4,75.7
  pour cut-out: 92,45 91.6,45.4 91.6,44.8 91.8,45
  pour cut-out: 99.3,45.4 99.3,45.3 98.9,44.9 99.5,44.9 99.5,45.2
  pour cut-out: 81,34.6 80.7,34.3 80.5,34.5 80.5,34.8 80.6,34.9 80.9,34.6
  pour cut-out: 69.4,8.3 69,8.7 69,8.3

## Silkscreen, mask and mechanical layers (free items; w line width, h text height)
Top Overlay:
  text "SMART PODIUM" at 58.3,42.1 h4
  text "5V" at 20.748,33.501 h2
  text "3.3V" at 19.291,31.493 h2
  text "USER" at 63.984,31.093 h2
  text "GND" at 33.33,23.368 h2
  text "+3.3V" at 32.342,18.218 h2
  text "TX" at 34.451,15.718 h2
  text "+12VDC" at 5.248,13.993 h2
  text "RX" at 34.449,13.193 h2
  text "BOOT" at 42.044,0.793 h1.8
  text "ENABLE" at 78.204,0.793 h1.8
Bottom Overlay:
  lines w0.1: 11.2,85.2 12.8,82.2 ; 13.5,75.2 13.5,81.7 ; 13.6,85.3 13.6,86.3 ; 35.485,85.051 37.085,82.051 ; 37.8,75.1 37.8,81.6 ; 37.885,85.151 37.885,86.151 ; 60.185,85.151 61.785,82.151 ; 62.485,75.151 62.485,81.651 ; 62.585,85.251 62.585,86.251 ; 85.185,85.151 86.785,82.151 ; 87.485,75.151 87.485,81.651 ; 87.585,85.251 87.585,86.251
  text "+5V Relay" at 14.954,61.842 h2
  text "Vellore Institute of Technology (Vellore)" at 75.937,57.118 h4
  text "+5V" at 10.549,56.701 h2
  text "IoT Domain Analyst Project" at 76.937,51.368 h4
  text "Group Members:" at 85.125,46.559 h4
  text "+5V" at 95.449,45.751 h2
  text "Mohit Banka" at 84.25,43.439 h3.56
  text "+3.3V" at 95.408,43.243 h2
  text "Button 1" at 95.134,40.993 h2
  text "Naman Tanwar" at 84.25,40.715 h3.56
  text "Button 2" at 95.227,38.493 h2
  text "Monish Kumar H.S" at 84.25,37.939 h3.56
  text "Button 3" at 95.229,35.743 h2
  text "Sushmit Sanskar" at 84.25,35.338 h3.56
  text "Button 4" at 95.244,33.243 h2
  text "LED 4" at 95.18,30.734 h2
  text "LED 3" at 95.166,28.243 h2
  text "LED 2" at 95.164,25.734 h2
  text "GND" at 37.17,23.318 h2
  text "LED 1" at 95.07,23.234 h2
  text "IR LED" at 95.012,20.743 h2
  text "+3.3V" at 37.158,18.243 h2
  text "GND" at 94.92,18.243 h2
  text "Designed By:" at 33.006,17.768 h4
  text "NAMAN TANWAR" at 31.65,16.125 h4
  text "TX" at 37.149,15.718 h2
  text "RX" at 37.126,13.193 h2
Board Shape:
  lines w0.5: 18.6,89.2 16,86.6 16,82.9 16.8,82.9 16.9,83 16.9,86.7 19.5,89.3 19.5,97.1 18.7,97.1 18.6,97.2 18.6,89.2 ; 18.6,89.2 18.6,89.2 ; 0,0 0,100 100,100 100,0 71.9,0 71.9,6.8 52.9,6.8 52.9,0 0,0 ; 5.6,75.8 9.5,75.8 9.5,68.9 17.5,68.9 17.6,68.8 17.6,75.8 21,75.8 21,76.8 16.6,76.8 16.6,69.9 10.5,69.9 10.3,70.1 10.3,76.8 5.6,76.8 5.6,75.8 ; 10.4,82.9 11.2,82.9 11.2,87 14.6,90.4 14.6,97.2 13.9,97.2 13.9,90.7 11.9,88.7 10.4,88.7 10.4,82.9 ; 30.1,75.8 34,75.8 34,68.9 42,68.9 42.1,68.8 42.1,75.8 45.5,75.8 45.5,76.8 41.1,76.8 41.1,69.9 35,69.9 34.8,70.1 34.8,76.8 30.1,76.8 30.1,75.8 ; 34.2,83.1 35.2,83.1 35.2,96.9 34.2,96.9 34.2,83.1 ; 40.3,83.8 41.5,83.8 41.4,83.9 41.4,88.8 40.9,89.3 40.9,96.9 40.3,96.9 40.3,83.8 ; 54.7,75.8 58.6,75.8 58.6,68.9 66.6,68.9 66.7,68.8 66.7,75.8 70.1,75.8 70.1,76.8 65.7,76.8 65.7,69.9 59.6,69.9 59.4,70.1 59.4,76.8 54.7,76.8 54.7,75.8 ; 59.2,83.4 60,83.4 60.1,83.3 60.1,97.1 59.2,97.1 59.2,83.4 ; 64.8,83.8 66.2,83.8 66.2,88.6 65.5,89.3 65.5,97.1 64.8,97.1 64.8,83.8 ; 79.65,75.9 83.55,75.9 83.55,69 91.55,69 91.65,68.9 91.65,75.9 95.05,75.9 95.05,76.9 90.65,76.9 90.65,70 84.55,70 84.35,70.2 84.35,76.9 79.65,76.9 79.65,75.9 ; 80.5,91.7 81.5,90.7 82.3,90.7 83.8,89.2 83.8,83.6 84.8,83.6 84.8,89.3 81.5,92.6 81.5,96.8 80.5,96.8 80.5,91.7 ; 85.5,93.3 89.9,88.9 89.9,83.5 91.2,83.5 91.3,83.4 91.3,87.5 90.3,88.5 90.3,91.5 88.7,91.5 87.4,92.8 87.4,96.8 85.7,96.8 85.6,96.9 85.5,96.8 85.5,93.3

## Text inside footprints (layer, text, board x,y; h text height)
U5: Assembly Notes "ANTENNA" at 56.4,2.55 h1.78